# EAGLE board PCB (EAGLE 9.7.0)
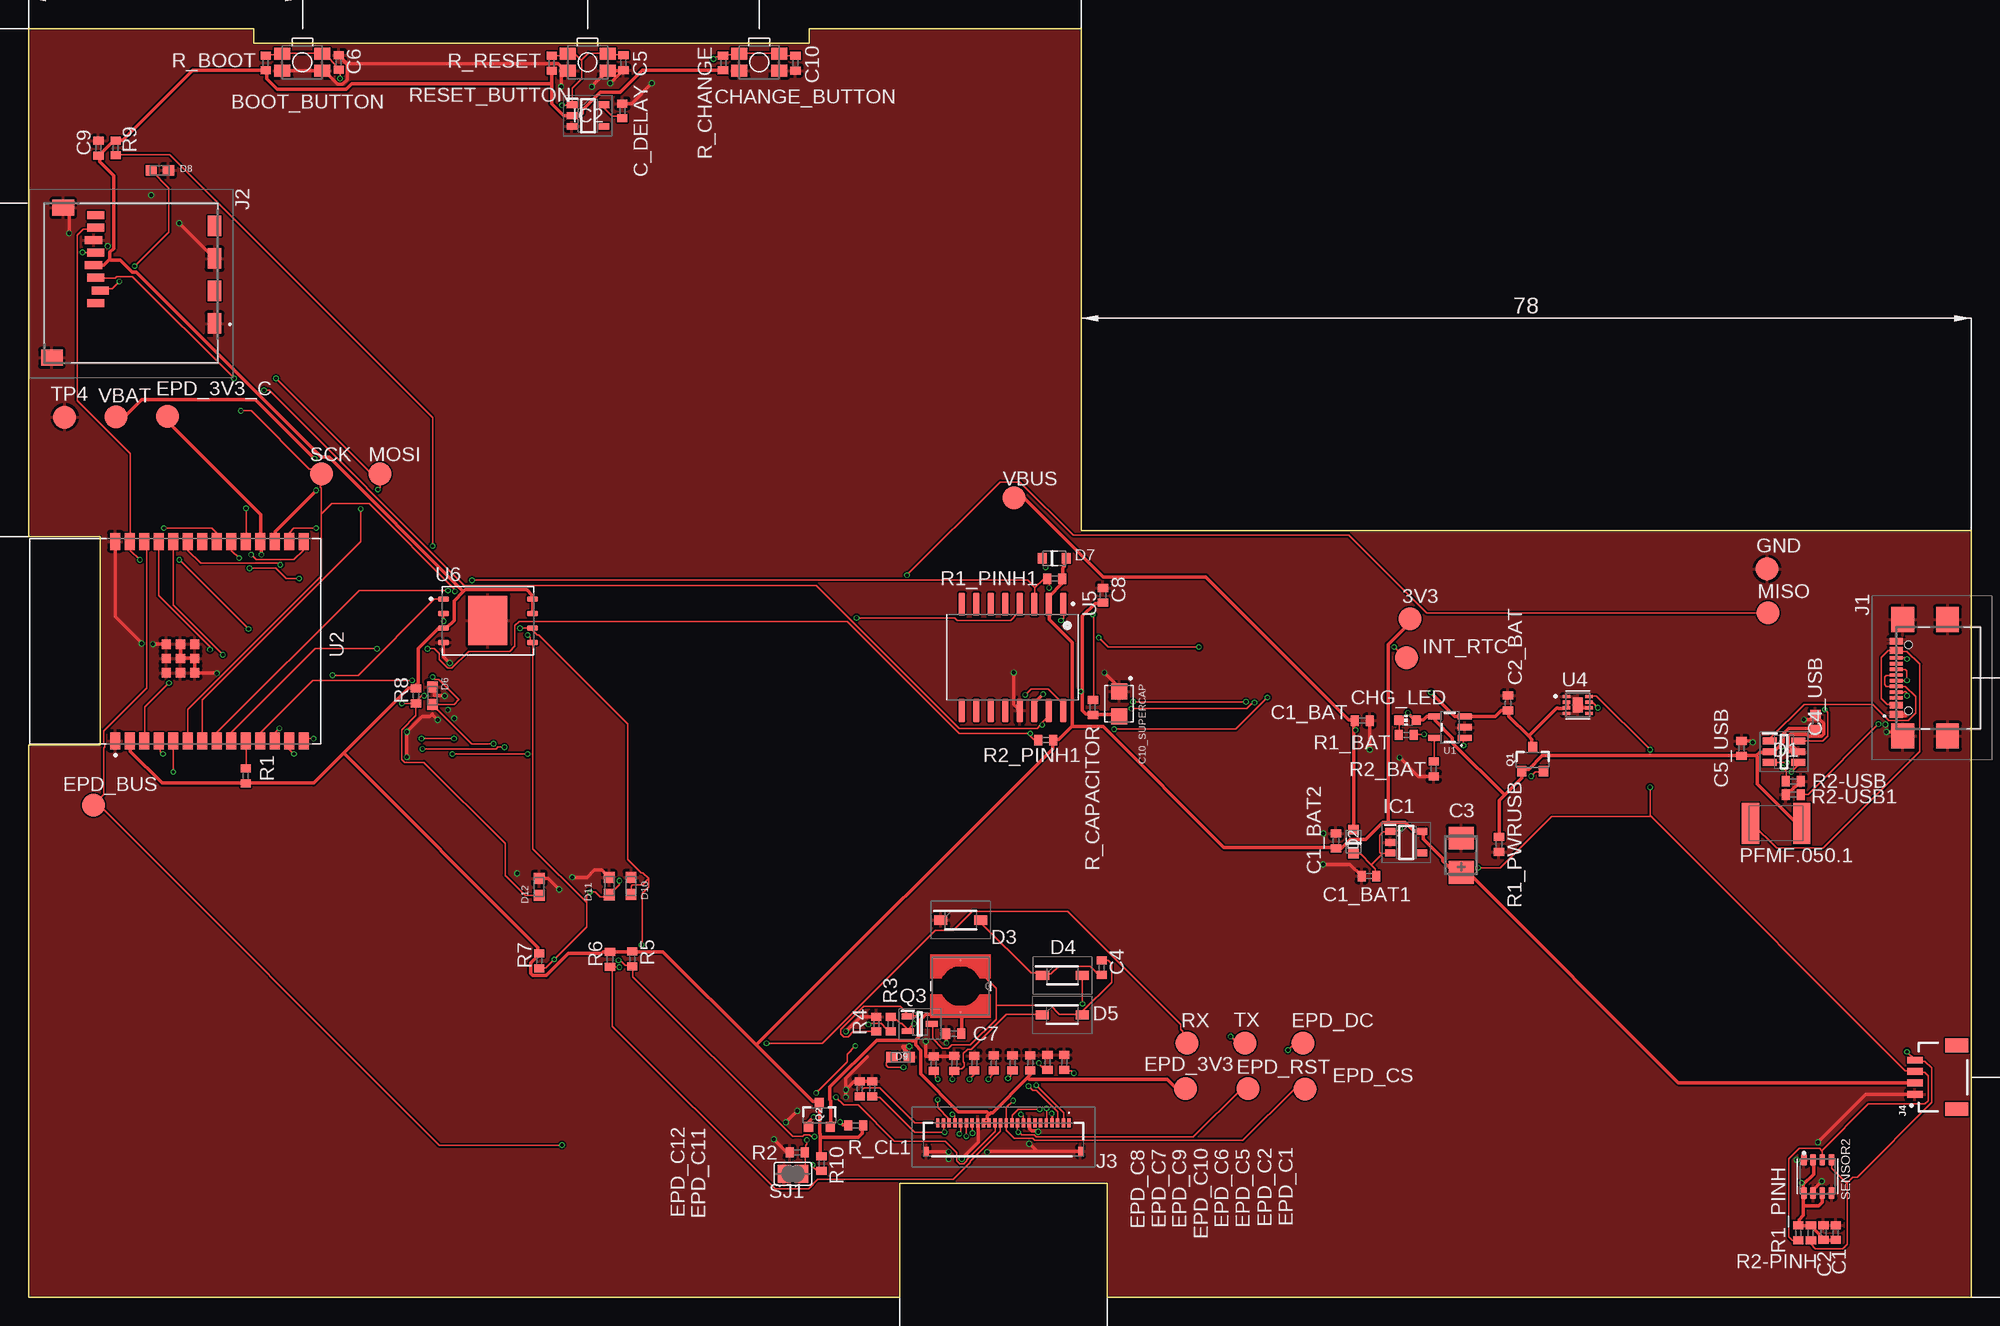
[diagram p0: board, top side]
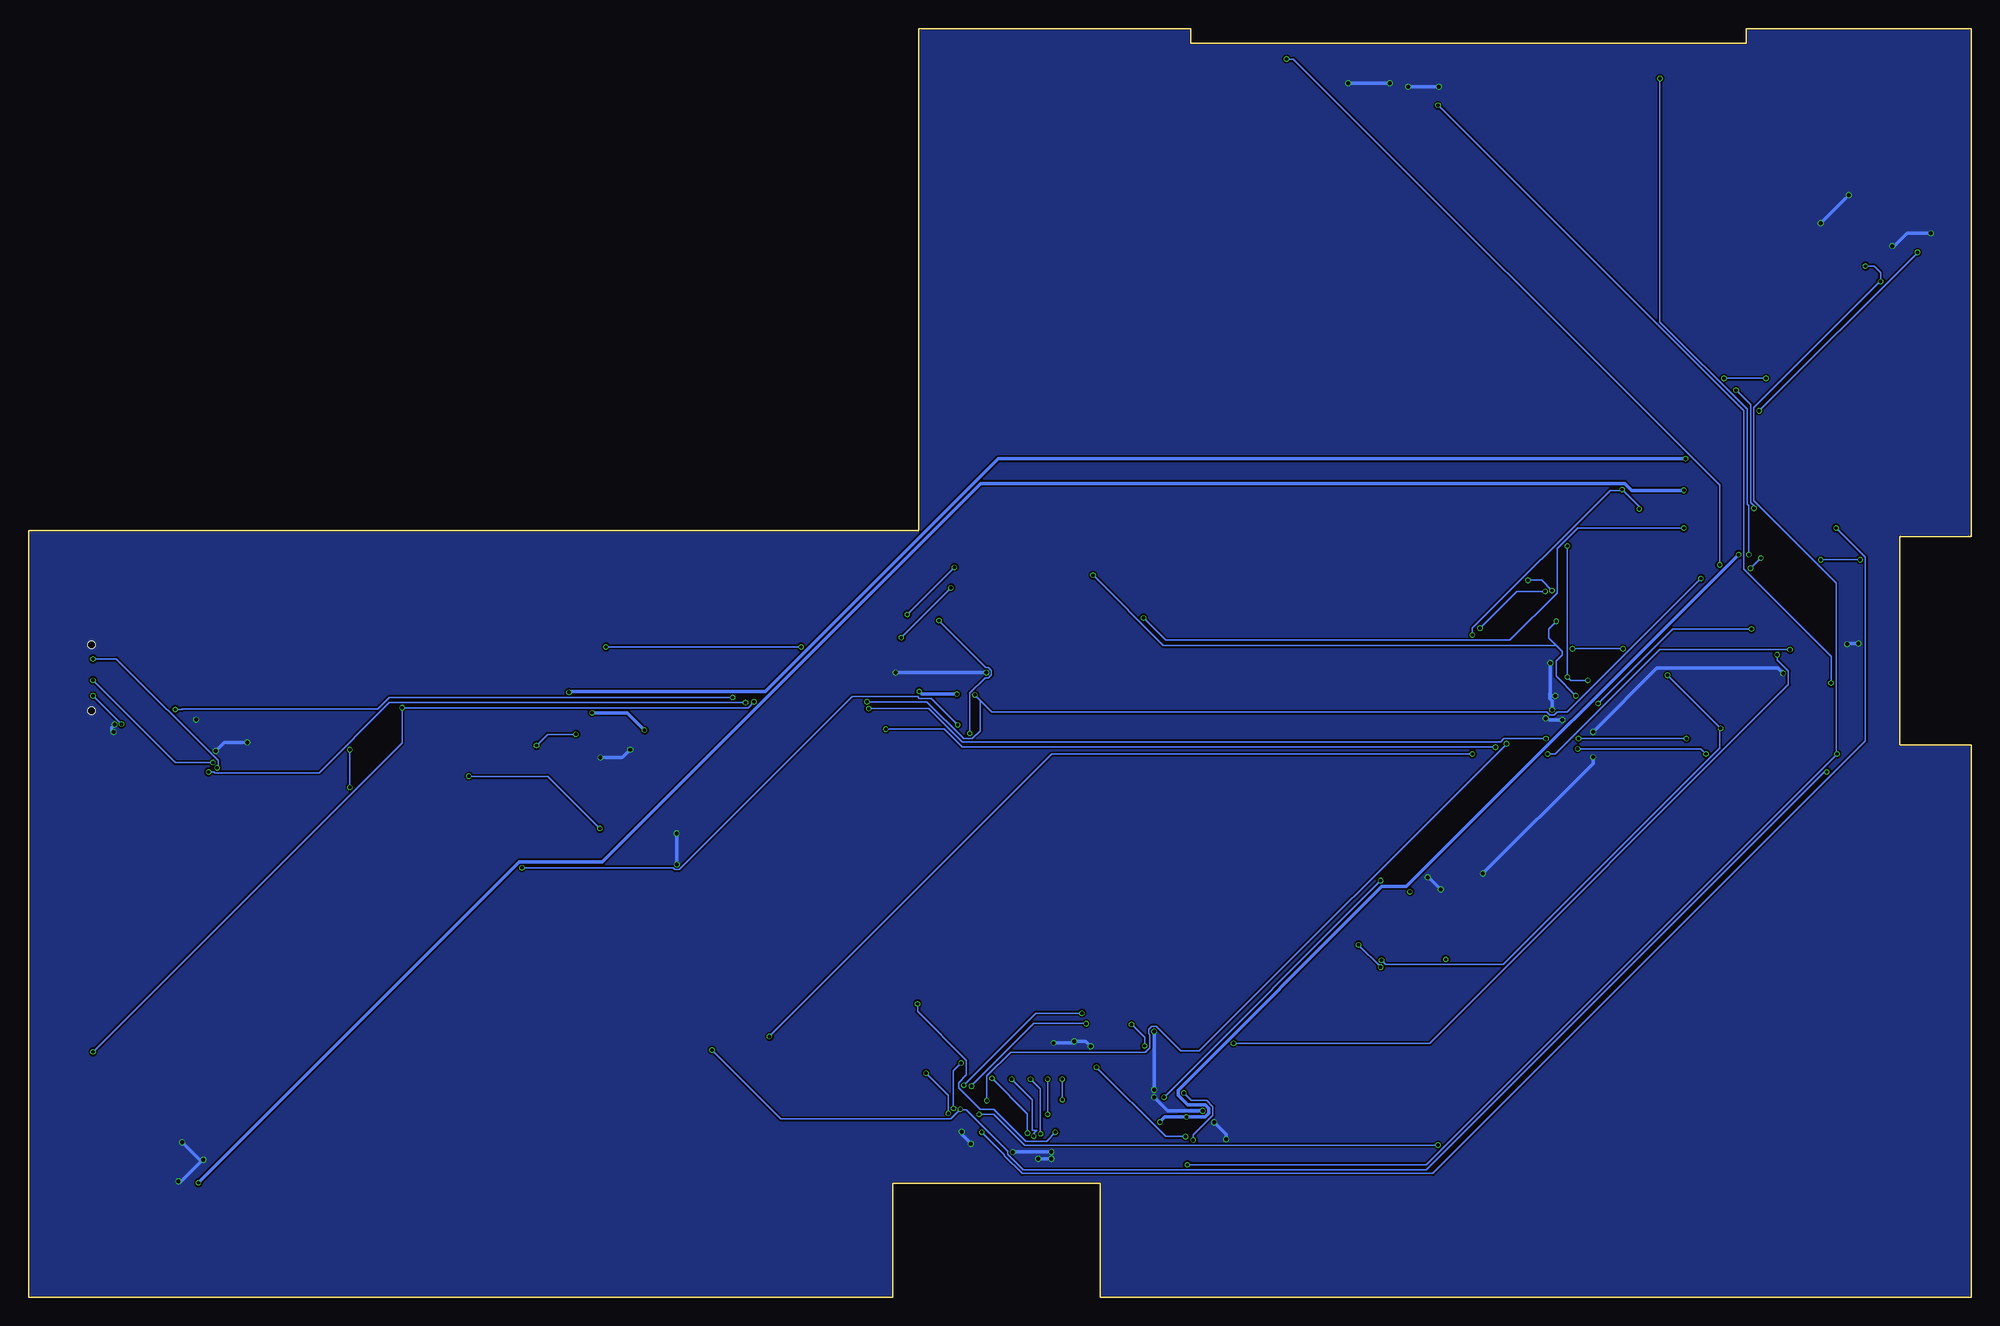
[diagram p1: board, bottom side, seen from below]

Size 170.2 x 111.2 mm. Coordinates in mm from the lower left corner, seen from the top.
Outline: 0,111.2 19.75,111.2 19.75,109.9 68.4,109.9 68.4,111.2 92.2,111.2 92.2,67.2 170.2,67.2 170.2,0 94.5,0 94.5,10 76.3,10 76.3,0 0,0 0,48.4 6.3,48.4 6.3,66.7 0,66.7 0,111.2
Copper layers (1*16): Top 0.035mm / dielectric 1.6mm / Bottom 0.035mm
Design rules "jlcpcb-2layers *": minimum track width 0.15mm, minimum drill 0.3mm, track to track 0.15mm, track to pad 5mil, pad to pad 5mil, via to via 5mil, smd to smd 5mil, copper to edge 0mil, drill to drill 6mil, minimum pad ring 10mil, minimum via ring 3mil, stop-mask expansion 4mil, vias tented up to drill 0mil, thermal gap 10mil
Net classes: 2 0.30: width 0.3 mm

## Footprints (pad centres in the part's own frame; a part is rotated, then mirrored left to right if it is on the bottom)
TP20R = smd 2 x 2: TP 0,0
MYBUTTON = smd 1.4 x 1.05: 1 1.75,0.75; 2 -1.75,0.75; 3 -1.75,-0.75; 4 1.75,-0.75
ESP32_WROVER_EAGLE-LTSPICE_C0402 = smd 0.7 x 0.9: 1 -0.65,0; 2 0.65,0
RCL_CT3528 = smd 2 x 2.2: + -1.5,0; - 1.5,0
CAPCP3225X100N = smd 1.4 x 1.4: 1 -1.1,0; 2 1.1,0
ADAFRUIT_CHIP-LED0603 = smd 0.8 x 0.8: A 0,-0.75; C 0,0.75
SOT95P280X145-6N = smd 1.2 x 0.6: 1 -1.25,0.95; 2 -1.25,0; 3 -1.25,-0.95; 4 1.25,-0.95; 5 1.25,0; 6 1.25,0.95
ESP32_WROVER_AVX---SD0805S020S1R0_AVX_SD0805S020S1R0_0 = smd 0.8 x 0.9: 1 -1.05,0; 2 1.05,0
SOD3716X135N = smd 1.15 x 0.8: 1 -1.75,0; 2 1.75,0
DIOC1608X36N = smd 0.97 x 0.94: 1 -0.75,0; 2 0.75,0
SOT95P280X120-5N = smd 0.9 x 0.6: 1 -1.4,0.95; 2 -1.4,0; 3 -1.4,-0.95; 4 1.4,-0.95; 5 1.4,0.95
SOT95P280X125-5N = smd 0.9 x 0.6: 1 -1.4,0.95; 2 -1.4,0; 3 -1.4,-0.95; 4 1.4,-0.95; 5 1.4,0.95
SAMACSYS_PARTS_USB4110GFA = smd 0.3 x 1.15: A1 -3.35,3.678; A4 -2.55,3.678; A5 -1.25,3.678; A6 -0.25,3.678; A7 0.25,3.678; A8 1.25,3.678; A9 2.55,3.678; A12 3.35,3.678; B1 3.05,3.678; B4 2.25,3.678; B5 1.75,3.678; B6 0.75,3.678; B7 -0.75,3.678; B8 -1.75,3.678; B9 -2.25,3.678; B12 -3.05,3.678 | smd 2.18 x 2: MP1 -5.11,-0.827; MP2 5.11,-0.827; MP3 -5.11,3.103; MP4 5.11,3.103 | hole 0.65: -2.89,2.603; 2.89,2.603
112ATAARR03ATTEND = smd 1.8 x 1.2: G1 10.6,10.4; G2 4.9,10.4; S1 7.75,10.4; S2 2.05,10.4 | smd 1.4 x 1.9: G3 13.6,-3.85; G4 0.45,-2.85 | smd 0.7 x 1.5: P1 8.8,0; P2 7.7,0.4; P3 6.6,0; P4 5.5,-0.2; P5 4.4,0; P6 3.3,-0.2; P7 2.2,0; P8 1.1,0
FH34SRJ24S05SH99 = smd 0.3 x 0.8: 1 5.75,1.45; 2 5.25,1.45; 3 4.75,1.45; 4 4.25,1.45; 5 3.75,1.45; 6 3.25,1.45; 7 2.75,1.45; 8 2.25,1.45; 9 1.75,1.45; 10 1.25,1.45; 11 0.75,1.45; 12 0.25,1.45; 13 -0.25,1.45; 14 -0.75,1.45; 15 -1.25,1.45; 16 -1.75,1.45; 17 -2.25,1.45; 18 -2.75,1.45; 19 -3.25,1.45; 20 -3.75,1.45; 21 -4.25,1.45; 22 -4.75,1.45; 23 -5.25,1.45; 24 -5.75,1.45 | smd 0.4 x 0.8: MP1 6.75,-1.05; MP2 -6.75,-1.05
JST04_1MM_RA = smd 0.6 x 1.35: 1 -1.5,0; 2 -0.5,0; 3 0.5,0; 4 1.5,0 | smd 1.2 x 2: NC1 2.8,-3.675; NC2 -2.8,-3.675
IND_4828-WE-TPC_WRE = smd 0.127 x 0.127: 1 -2.286,0; 2 2.286,0
ESP32C6_VARISTOR_CT/CN1812 = smd 1.5 x 3.6: 1 -2.25,0; 2 2.25,0
ESP32_WROVER_SPARKFUN-DISCRETESEMI_SOT23-3 = smd 0.8 x 0.9: 1 -0.95,-1; 2 0.95,-1; 3 0,1.1
SOT65P210X110-3N = smd 1.05 x 0.5: 1 -1.05,0.65; 2 -1.05,-0.65; 3 1.05,0
ESP32_WROVER_EAGLE-LTSPICE_R0402 = smd 0.7 x 0.9: 1 -0.65,0; 2 0.65,0
ESP32_WROVER_BME680_PSON80P300X300X100-8N = smd 1.016 x 0.5: 1 1.458,1.2; 2 1.458,0.4; 3 1.458,-0.4; 4 1.458,-1.2; 5 -1.458,-1.22; 6 -1.458,-0.4; 7 -1.458,0.4; 8 -1.458,1.2
SJ = smd 1.168 x 1.6: 1 -0.762,0; 2 0.762,0
ESP32_WROVER_SPARKFUN-IC-POWER_SOT23-5 = smd 0.55 x 1.2: 1 -0.95,-1.3; 2 0,-1.3; 3 0.95,-1.3; 4 0.95,1.3; 5 -0.95,1.3
XCVR_ESP32-C6-WROOM-1-N8 = smd 1.5 x 0.9: 1 -8.75,5.26; 2 -8.75,3.99; 3 -8.75,2.72; 4 -8.75,1.45; 5 -8.75,0.18; 6 -8.75,-1.09; 7 -8.75,-2.36; 8 -8.75,-3.63; 9 -8.75,-4.9; 10 -8.75,-6.17; 11 -8.75,-7.44; 12 -8.75,-8.71; 13 -8.75,-9.98; 14 -8.75,-11.25; 15 8.75,-11.25; 16 8.75,-9.98; 17 8.75,-8.71; 18 8.75,-7.44; 19 8.75,-6.17; 20 8.75,-4.9; 21 8.75,-3.63; 22 8.75,-2.36; 23 8.75,-1.09; 24 8.75,0.18; 25 8.75,1.45; 26 8.75,2.72; 27 8.75,3.99; 28 8.75,5.26 | smd 0.8 x 0.8: 29_1 -2.755,0.79; 29_2 -1.505,0.79; 29_3 -0.255,0.79; 29_4 -2.755,-0.46; 29_5 -1.505,-0.46; 29_6 -0.255,-0.46; 29_7 -2.755,-1.71; 29_8 -1.505,-1.71; 29_9 -0.255,-1.71
SON50P200X200X80-9N = smd 0.76 x 0.27: 1 -0.985,0.75; 2 -0.985,0.25; 3 -0.985,-0.25; 4 -0.985,-0.75; 5 0.985,-0.75; 6 0.985,-0.25; 7 0.985,0.25; 8 0.985,0.75 | smd 0.9 x 1.3: 9 0,0
SOIC127P1032X265-16N = smd 2.05 x 0.59: 1 -4.655,4.445; 2 -4.655,3.175; 3 -4.655,1.905; 4 -4.655,0.635; 5 -4.655,-0.635; 6 -4.655,-1.905; 7 -4.655,-3.175; 8 -4.655,-4.445; 9 4.655,-4.445; 10 4.655,-3.175; 11 4.655,-1.905; 12 4.655,-0.635; 13 4.655,0.635; 14 4.655,1.905; 15 4.655,3.175; 16 4.655,4.445
SON127P600X800X80-9N = smd 0.94 x 0.44: 1 -3.895,1.905; 2 -3.895,0.635; 3 -3.895,-0.635; 4 -3.895,-1.905; 5 3.895,-1.905; 6 3.895,-0.635; 7 3.895,0.635; 8 3.895,1.905 | smd 3.4 x 4.3: 9 0,0

## Placement (x,y rotation side)
3V3  TP  [TP20R]  121.03,59.46 0 top
BOOT_BUTTON  BUTTON_CUSYOMV1NEW  [MYBUTTON]  23.98,108.25 180 top
C1  100nF  [ESP32_WROVER_EAGLE-LTSPICE_C0402]  158.32,5.69 90 top
C1_BAT  4.7uF  [ESP32_WROVER_EAGLE-LTSPICE_C0402]  116.83,50.55 0 top
C1_BAT1  4.7uF  [ESP32_WROVER_EAGLE-LTSPICE_C0402]  117.42,36.93 180 top
C1_BAT2  4.7uF  [ESP32_WROVER_EAGLE-LTSPICE_C0402]  114.53,40.02 90 top
C2  100nF  [ESP32_WROVER_EAGLE-LTSPICE_C0402]  157.23,5.69 90 top
C2_BAT  4.7uF  [ESP32_WROVER_EAGLE-LTSPICE_C0402]  129.6,52.09 90 top
C3  100uF TANT  [RCL_CT3528]  125.5,38.75 90 top
C4  4.7uF/25V  [ESP32_WROVER_EAGLE-LTSPICE_C0402]  94.01,28.9 90 top
C4_USB  100nF  [ESP32_WROVER_EAGLE-LTSPICE_C0402]  156.53,50.48 90 top
C5  1uF  [ESP32_WROVER_EAGLE-LTSPICE_C0402]  52.11,108.19 270 top
C5_USB  4.7uF  [ESP32_WROVER_EAGLE-LTSPICE_C0402]  150.06,48.12 90 top
C6  100nF  [ESP32_WROVER_EAGLE-LTSPICE_C0402]  27.18,108.22 90 top
C7  10uF  [ESP32_WROVER_EAGLE-LTSPICE_C0402]  81.06,23.12 180 top
C8  100nF  [ESP32_WROVER_EAGLE-LTSPICE_C0402]  94.12,61.53 90 top
C9  100nF  [ESP32_WROVER_EAGLE-LTSPICE_C0402]  6.12,100.71 90 top
C10  100nF  [ESP32_WROVER_EAGLE-LTSPICE_C0402]  67.18,108.16 270 top
C10_SUPERCAP  CPH3225A  [CAPCP3225X100N]  95.54,52.01 270 top
C_DELAY  100nF  [ESP32_WROVER_EAGLE-LTSPICE_C0402]  52.01,103.98 90 top
CHANGE_BUTTON  BUTTON_CUSYOMV1NEW  [MYBUTTON]  64.01,108.25 180 top
CHG_LED  [ADAFRUIT_CHIP-LED0603]  120.8,50.59 90 top
D1  USBLC6-2SC6Y  [SOT95P280X145-6N]  153.78,47.82 0 top
D2  ESP32_WROVER_AVX---SD0805S020S1R0_AVX_SD0805S020S1R0_0_0AVX_SD0805S020S1R0_0_0  [ESP32_WROVER_AVX---SD0805S020S1R0_AVX_SD0805S020S1R0_0]  116.07,39.94 90 top
D3  MBR0530  [SOD3716X135N]  81.66,33.07 0 top
D4  MBR0530  [SOD3716X135N]  90.57,28.23 0 top
D5  MBR0530  [SOD3716X135N]  90.56,24.78 0 top
D6  PGB1010603MRNEW  [DIOC1608X36N]  35.38,52.73 90 top
D7  ESP32_WROVER_AVX---SD0805S020S1R0_AVX_SD0805S020S1R0_0_0AVX_SD0805S020S1R0_0_0  [ESP32_WROVER_AVX---SD0805S020S1R0_AVX_SD0805S020S1R0_0]  89.84,64.78 0 top
D8  PGB1010603MRNEW  [DIOC1608X36N]  11.51,98.77 0 top
D9  PGB1010603MRNEW  [DIOC1608X36N]  76.39,21.07 0 top
D10  PGB1010603MRNEW  [DIOC1608X36N]  52.78,36.07 90 top
D11  PGB1010603MRNEW  [DIOC1608X36N]  50.88,36.05 90 top
D12  PGB1010603MRNEW  [DIOC1608X36N]  44.73,35.98 90 top
EPD_3V3  TP  [TP20R]  101.33,18.31 0 top
EPD_3V3_C  TP  [TP20R]  12.18,77.21 0 top
EPD_BUS  TP  [TP20R]  5.67,43.14 0 top
EPD_C1  1uF/50V  [ESP32_WROVER_EAGLE-LTSPICE_C0402]  90.72,20.61 270 top
EPD_C2  1uF/50V  [ESP32_WROVER_EAGLE-LTSPICE_C0402]  89.27,20.6 270 top
EPD_C5  0.1uF/50V  [ESP32_WROVER_EAGLE-LTSPICE_C0402]  87.75,20.57 270 top
EPD_C6  1uF/50V  [ESP32_WROVER_EAGLE-LTSPICE_C0402]  86.2,20.56 270 top
EPD_C7  1uF/50V  [ESP32_WROVER_EAGLE-LTSPICE_C0402]  84.55,20.55 270 top
EPD_C8  1uF/50V  [ESP32_WROVER_EAGLE-LTSPICE_C0402]  82.85,20.54 270 top
EPD_C9  1uF/50V  [ESP32_WROVER_EAGLE-LTSPICE_C0402]  81.1,20.53 270 top
EPD_C10  1uF/50V  [ESP32_WROVER_EAGLE-LTSPICE_C0402]  79.29,20.49 270 top
EPD_C11  1uF/50V  [ESP32_WROVER_EAGLE-LTSPICE_C0402]  73.91,18.29 270 top
EPD_C12  1uF/50V  [ESP32_WROVER_EAGLE-LTSPICE_C0402]  72.81,18.29 270 top
EPD_CS  TP  [TP20R]  111.83,18.26 0 top
EPD_DC  TP  [TP20R]  111.64,22.29 0 top
EPD_RST  TP  [TP20R]  106.83,18.31 0 top
GND  TP  [TP20R]  152.29,63.84 0 top
IC1  XC6220A331MR-G  [SOT95P280X120-5N]  120.68,39.89 0 top
IC2  BD5229G-TR  [SOT95P280X125-5N]  49,103.57 0 top
INT_RTC  TP  [TP20R]  120.73,56.06 0 top
J1  SAMACSYS_PARTS_USB4110-GF-A  [SAMACSYS_PARTS_USB4110GFA]  167.28,54.3 90 top
J2  112A-TAAR-R03_ATTEND  [112ATAARR03ATTEND]  5.89,95.95 270 top
J3  FH34SRJ-24S-0.5SH_99_  [FH34SRJ24S05SH99]  85.4,13.84 0 top
J4  QWIIC_RIGHT_ANGLE  [JST04_1MM_RA]  165.25,19.3 90 top
L1  68uH  [IND_4828-WE-TPC_WRE]  81.65,27.28 270 top
MISO  TP  [TP20R]  152.36,59.99 0 top
MOSI  TP  [TP20R]  30.78,72.19 0 top
PFMF.050.1  ESP32C6_VARISTORCN1812  [ESP32C6_VARISTOR_CT/CN1812]  153.09,41.55 0 top
Q1  20V/4.2A/52mΩ/1.4W  [ESP32_WROVER_SPARKFUN-DISCRETESEMI_SOT23-3]  131.76,47.11 0 top
Q2  20V/4.2A/52mΩ/1.4W  [ESP32_WROVER_SPARKFUN-DISCRETESEMI_SOT23-3]  69.28,15.96 0 top
Q3  SI1308EDL-T1-GE3  [SOT65P210X110-3N]  78.09,23.98 0 top
R1  10K  [ESP32_WROVER_EAGLE-LTSPICE_R0402]  19.03,45.7 270 top
R1_BAT  200  [ESP32_WROVER_EAGLE-LTSPICE_R0402]  120.7,49.3 0 top
R1_PINH  10K  [ESP32_WROVER_EAGLE-LTSPICE_R0402]  155.03,5.66 90 top
R1_PINH1  10K  [ESP32_WROVER_EAGLE-LTSPICE_R0402]  89.91,62.99 0 top
R1_PWRUSB  100k  [ESP32_WROVER_EAGLE-LTSPICE_R0402]  128.81,39.7 90 top
R2  2.2  [ESP32_WROVER_EAGLE-LTSPICE_R0402]  67.33,12.71 0 top
R2-PINH  10K  [ESP32_WROVER_EAGLE-LTSPICE_R0402]  156.13,5.67 90 top
R2-USB  5k1  [ESP32_WROVER_EAGLE-LTSPICE_R0402]  154.58,45.23 0 top
R2-USB1  5K1  [ESP32_WROVER_EAGLE-LTSPICE_R0402]  154.6,44.07 0 top
R2_BAT  2K  [ESP32_WROVER_EAGLE-LTSPICE_R0402]  123.1,46.31 90 top
R2_PINH1  10K  [ESP32_WROVER_EAGLE-LTSPICE_R0402]  89.11,48.84 0 top
R3  0.47  [ESP32_WROVER_EAGLE-LTSPICE_R0402]  75.52,23.96 90 top
R4  10K  [ESP32_WROVER_EAGLE-LTSPICE_R0402]  74.26,23.96 270 top
R5  10K  [ESP32_WROVER_EAGLE-LTSPICE_R0402]  52.89,29.66 90 top
R6  10K  [ESP32_WROVER_EAGLE-LTSPICE_R0402]  50.94,29.63 90 top
R7  10K  [ESP32_WROVER_EAGLE-LTSPICE_R0402]  44.74,29.5 90 top
R8  10K  [ESP32_WROVER_EAGLE-LTSPICE_R0402]  33.94,52.72 90 top
R9  10K  [ESP32_WROVER_EAGLE-LTSPICE_R0402]  7.64,100.74 90 top
R10  10K  [ESP32_WROVER_EAGLE-LTSPICE_R0402]  69.47,11.73 90 top
R_BOOT  10K  [ESP32_WROVER_EAGLE-LTSPICE_R0402]  20.78,108.18 270 top
R_CAPACITOR  15  [ESP32_WROVER_EAGLE-LTSPICE_R0402]  93.24,51.7 270 top
R_CHANGE  10K  [ESP32_WROVER_EAGLE-LTSPICE_R0402]  60.84,108.18 270 top
R_CL1  10K  [ESP32_WROVER_EAGLE-LTSPICE_R0402]  72.46,15.08 0 top
R_RESET  10K  [ESP32_WROVER_EAGLE-LTSPICE_R0402]  45.84,108.16 270 top
RESET_BUTTON  BUTTON_CUSYOMV1NEW  [MYBUTTON]  48.97,108.25 180 top
RX  TP  [TP20R]  101.48,22.29 0 top
SCK  TP  [TP20R]  25.65,72.19 0 top
SENSOR2  ESP32_WROVER_BME680_BME680  [ESP32_WROVER_BME680_PSON80P300X300X100-8N]  156.73,10.6 90 top
SJ1  [SJ]  66.96,10.84 0 top
TP4  TP  [TP20R]  3.17,77.14 0 top
TX  TP  [TP20R]  106.56,22.29 0 top
U1  ESP32_WROVER_SPARKFUN-IC-POWER_MCP73831  [ESP32_WROVER_SPARKFUN-IC-POWER_SOT23-5]  124.51,49.97 90 top
U2  ESP32-C6-WROOM-1-N8  [XCVR_ESP32-C6-WROOM-1-N8]  12.85,57.5 90 top
U4  MAX17048G+T10  [SON50P200X200X80-9N]  135.71,51.92 0 top
U5  DS3231SN#  [SOIC127P1032X265-16N]  86.2,56.1 270 top
U6  W25Q512JVEIQ  [SON127P600X800X80-9N]  40.24,59.31 0 top
VBAT  TP  [TP20R]  7.65,77.19 0 top
VBUS  TP  [TP20R]  86.33,70.06 0 top

## Library data of the parts
3V3 BOOT_BUTTON C1 C1_BAT C1_BAT1 C1_BAT2 C2 C2_BAT C4 C4_USB C5 C5_USB C6-C10 C_DELAY CHANGE_BUTTON CHG_LED D6 D8-D12 EPD_3V3 EPD_3V3_C EPD_BUS EPD_C1 EPD_C2 EPD_C5-EPD_C12 EPD_CS EPD_DC EPD_RST GND INT_RTC MISO MOSI PFMF.050.1 R1 R1_BAT R1_PINH R1_PINH1 R1_PWRUSB R2 R2-PINH R2-USB R2-USB1 R2_BAT R2_PINH1 R3-R10 R_BOOT R_CAPACITOR R_CHANGE R_CL1 R_RESET RESET_BUTTON RX SCK SJ1 TP4 TX VBAT VBUS = DeskAssistant v19 v1
C3 = DeskAssistant v19 v1; SPICEPREFIX: C
C10_SUPERCAP = DeskAssistant v19 v1; AVAILABILITY: Not in stock; CHECK_PRICES: https://www.snapeda.com/parts/CPH3225A/Seiko+Instruments/view-part/?ref=eda; DESCRIPTION: 11 mF (EDLC) Supercapacitor 3.3 V 1210 (3225 Metric) - -; MF: Seiko Instruments; MP: CPH3225A; PACKAGE: 1210 Seiko; PRICE: None; PURCHASE-URL: https://www.snapeda.com/api/url_track_click_mouser/?unipart_id=562593&manufacturer=Seiko Instruments&part_name=CPH3225A&search_term=None; SNAPEDA_LINK: https://www.snapeda.com/parts/CPH3225A/Seiko+Instruments/view-part/?ref=snap
D1 = DeskAssistant v19 v1; AVAILABILITY: In Stock; CHECK_PRICES: https://www.snapeda.com/parts/USBLC6-2SC6Y/STMicroelectronics/view-part/?ref=eda; DESCRIPTION: 17V Clamp 5A (8/20µs) Ipp Tvs Diode Surface Mount SOT-23-6; MF: STMicroelectronics; MP: USBLC6-2SC6Y; PACKAGE: SOT-23-6 STMicroelectronics; PRICE: None; SNAPEDA_LINK: https://www.snapeda.com/parts/USBLC6-2SC6Y/STMicroelectronics/view-part/?ref=snap
D2 D7 = DeskAssistant v19 v1; CENTROID_NOT_SPECIFIED: No; DATASHEET: http://datasheets.avx.com/schottky.pdf; DIGIKEY_DESCRIPTION: DIODE SCHOTTKY 20V 1A 0805; DIGIKEY_PART_NUMBER: 478-7800-1-ND; LEAD_FREE: yes; MF: AVX; MOUSER_PART_NUMBER: 581-SD0805S020S1R0; PACKAGE: 0805 (2012 metric); PREFIX: D; ROHS: yes; TEMPERATURE_RANGE_HIGH: +125°C; TEMPERATURE_RANGE_LOW: -55°C
D3-D5 = DeskAssistant v19 v1; AVAILABILITY: In Stock; CHECK_PRICES: https://www.snapeda.com/parts/MBR0530/Onsemi/view-part/?ref=eda; DESCRIPTION: Diode Schottky 30 V 500mA Surface Mount SOD-123; MF: ON Semiconductor; MP: MBR0530; PACKAGE: SOD-123-2 ON Semiconductor; PRICE: None; PURCHASE-URL: https://www.snapeda.com/api/url_track_click_mouser/?unipart_id=179458&manufacturer=ON Semiconductor&part_name=MBR0530&search_term=None; SNAPEDA_LINK: https://www.snapeda.com/parts/MBR0530/Onsemi/view-part/?ref=snap
IC1 = DeskAssistant v19 v1; DESCRIPTION: LDO Voltage Regulators; HEIGHT: 1.2mm; MANUFACTURER_NAME: Torex; MANUFACTURER_PART_NUMBER: XC6220A331MR-G; MOUSER_PART_NUMBER: 865-XC6220A331MR-G; MOUSER_PRICE-STOCK: https://www.mouser.co.uk/ProductDetail/Torex-Semiconductor/XC6220A331MR-G?qs=AsjdqWjXhJ8ZSWznL1J0gg%3D%3D
IC2 = DeskAssistant v19 v1; DESCRIPTION: Voltage Detector with Adjustable Delay Time: CMOS processes are utilized to develop high precision, low current consumption CMOS reset ICs that allow arbitrary setting of the delay time. The extensive lineup includes both Nch Open Drain and CMOS output types in a wide range of detection voltages (from 2.3V to 6.0V, in 0.1V steps), enabling selection of the ideal solution based on customer requirements. In addition, the entire series is of course both lead-free and RoHS-compliant.; HEIGHT: 1.25mm; MANUFACTURER_NAME: ROHM Semiconductor; MANUFACTURER_PART_NUMBER: BD5229G-TR; MOUSER_PART_NUMBER: 755-BD5229G-TR; MOUSER_PRICE-STOCK: https://www.mouser.co.uk/ProductDetail/ROHM-Semiconductor/BD5229G-TR?qs=4kLU8WoGk0vvnhrrYwdszw%3D%3D
J1 = DeskAssistant v19 v1; DESCRIPTION: CONN USB 2.0 TYPE-C R/A SMT; HEIGHT: 3.26mm; MANUFACTURER_NAME: GCT (GLOBAL CONNECTOR TECHNOLOGY); MANUFACTURER_PART_NUMBER: USB4110-GF-A; MOUSER_PART_NUMBER: 640-USB4110-GF-A; MOUSER_PRICE-STOCK: https://www.mouser.co.uk/ProductDetail/GCT/USB4110-GF-A?qs=KUoIvG%2F9IlYiZvIXQjyJeA%3D%3D
J2 = DeskAssistant v19 v1; DESCRIPTION: Micro SD Card Socket, Push-Push Type, Top Mount, SMT, H=1.83mm, 10u; HEIGHT: 1.9mm; MANUFACTURER_NAME: ATTEND; MANUFACTURER_PART_NUMBER: 112A-TAAR-R03 ATTEND
J3 = DeskAssistant v19 v1; DESCRIPTION: 24 Position FFC, FPC Connector Contacts, Top and Bottom 0.020" (0.50mm) Surface Mount, Right Angle; HEIGHT: 1.1mm; MANUFACTURER_NAME: Hirose; MANUFACTURER_PART_NUMBER: FH34SRJ-24S-0.5SH(99); MOUSER_PART_NUMBER: 798-FH34SRJ24S05SH99; MOUSER_PRICE-STOCK: https://www.mouser.co.uk/ProductDetail/Hirose-Connector/FH34SRJ-24S-0.5SH99?qs=vcbW%252B4%252BSTIpKBl5ap9J8Fw%3D%3D
J4 = DeskAssistant v19 v1; PROD_ID: CONN-13694
L1 = DeskAssistant v19 v1; COPYRIGHT: Copyright (C) 2024 Ultra Librarian. All rights reserved.; MANUFACTURER_PART_NUMBER: 744043680; MFR_NAME: Wurth Electronics
Q1 Q2 = DeskAssistant v19 v1; PROD_ID: TRAN-14388
Q3 = DeskAssistant v19 v1; AVAILABILITY: In Stock; CHECK_PRICES: https://www.snapeda.com/parts/SI1308EDL-T1-GE3/Vishay+Siliconix/view-part/?ref=eda; DESCRIPTION: Si1308EDL-T1-GE3 N-channel MOSFET Transistor, 1.5 A, 30 V, 3-Pin SC-70 | Siliconix / Vishay SI1308EDL-T1-GE3; MF: Vishay Siliconix; MP: SI1308EDL-T1-GE3; PACKAGE: SOT-323 Vishay Semiconductor; PRICE: None; PURCHASE-URL: https://www.snapeda.com/api/url_track_click_mouser/?unipart_id=274603&manufacturer=Vishay Siliconix&part_name=SI1308EDL-T1-GE3&search_term=None; SNAPEDA_LINK: https://www.snapeda.com/parts/SI1308EDL-T1-GE3/Vishay+Siliconix/view-part/?ref=snap
SENSOR2 = DeskAssistant v19 v1; AVAILABILITY: Unavailable; DESCRIPTION: Integrated Environmental Unit; MF: Bosch Sensortec; MP: BME680; PACKAGE: LGA-8 Bosch Tools; PRICE: None
U1 = DeskAssistant v19 v1; PROD_ID: IC-09995
U2 = DeskAssistant v19 v1; AVAILABILITY: In Stock; CHECK_PRICES: https://www.snapeda.com/parts/ESP32-C6-WROOM-1-N8/Espressif+Systems/view-part/?ref=eda; DESCRIPTION: Multiprotocol Modules ESP32-C6 module, Wi-Fi 6 in 2.4 GHz band, Bluetooth 5, Zigbee 3.0 and Thread. ESP34-WROOM Compatible - ENGINEERING SAMPLE; MF: Espressif Systems; MP: ESP32-C6-WROOM-1-N8; PACKAGE: None; PRICE: None; SNAPEDA_LINK: https://www.snapeda.com/parts/ESP32-C6-WROOM-1-N8/Espressif+Systems/view-part/?ref=snap
U4 = DeskAssistant v19 v1; AVAILABILITY: In Stock; CHECK_PRICES: https://www.snapeda.com/parts/MAX17048G+T10/Analog+Devices/view-part/?ref=eda; DESCRIPTION: 3µA 1-Cell/2-Cell Fuel Gauge with ModelGauge; MF: Analog Devices; MP: MAX17048G+T10; PACKAGE: TDFN-8 Maxim; PRICE: None; PURCHASE-URL: https://www.snapeda.com/api/url_track_click_mouser/?unipart_id=329239&manufacturer=Analog Devices&part_name=MAX17048G+T10&search_term=None; SNAPEDA_LINK: https://www.snapeda.com/parts/MAX17048G+T10/Analog+Devices/view-part/?ref=snap
U5 = DeskAssistant v19 v1; AVAILABILITY: In Stock; CHECK_PRICES: https://www.snapeda.com/parts/DS3231SN%23/Analog+Devices/view-part/?ref=eda; DESCRIPTION: Extremely Accurate I²C-Integrated RTC/TCXO/Crystal; MF: Analog Devices; MP: DS3231SN#; PACKAGE: SOIC-16 Maxim; PRICE: None; PURCHASE-URL: https://www.snapeda.com/api/url_track_click_mouser/?unipart_id=99048&manufacturer=Analog Devices&part_name=DS3231SN#&search_term=None; SNAPEDA_LINK: https://www.snapeda.com/parts/DS3231SN%23/Analog+Devices/view-part/?ref=snap
U6 = DeskAssistant v19 v1; AVAILABILITY: In Stock; CHECK_PRICES: https://www.snapeda.com/parts/W25Q512JVEIQ/Winbond+Electronics/view-part/?ref=eda; DESCRIPTION: FLASH - NOR Memory IC 512Mb (64M x 8) SPI - Quad I/O 133 MHz 8-WSON (8x6); MF: Winbond Electronics; MP: W25Q512JVEIQ; PACKAGE: Package; PRICE: None; SNAPEDA_LINK: https://www.snapeda.com/parts/W25Q512JVEIQ/Winbond+Electronics/view-part/?ref=snap

## Nets
3V3 [0.30]: 3V3.TP C1_BAT2.1 C3.+ C9.1 D7.2 IC1.5 IC2.2 J2.P4 J4.2 Q2.3 R1.2 R1_PINH1.2 R2_PINH1.2 R5.2 R6.2 R7.2 R8.2 R9.2 R10.2 R_BOOT.2 R_CHANGE.2 R_CL1.2 R_RESET.2 U2.2 U5.2 U6.3 U6.7 U6.8
32KHZ [0.15]: R2_PINH1.1 U2.9 U5.1
DN [0.15]: D1.1 J1.A7 J1.B7
DP [0.15]: D1.3 J1.A6 J1.B6
EPD_3V3 [0.30]: C7.1 EPD_3V3.TP EPD_C5.2 J3.15 J3.16 L1.2 Q2.2
EPD_3V3_C [0.30]: EPD_3V3_C.TP Q2.1 R_CL1.1 U2.18
EPD_BUSY [0.15]: EPD_BUS.TP J3.9 U2.26
EPD_CS [0.15]: D6.1 EPD_CS.TP J3.12 R9.1 U2.11
EPD_DC [0.15]: EPD_DC.TP J3.11 U2.5
EPD_RST [0.15]: EPD_RST.TP J3.10 U2.21
FLASH_CS [0.15]: D9.1 R5.1 U2.12 U6.1
GDR [0.15]: J3.2 Q3.1 R4.2
GND [0.30]: BOOT_BUTTON.1 BOOT_BUTTON.2 C1.2 C1_BAT1.2 C1_BAT2.2 C1_BAT.2 C2.2 C2_BAT.2 C3.- C4_USB.2 C5.2 C5_USB.2 C6.2 C7.2 C8.2 C9.2 C10.2 C10_SUPERCAP.1 C_DELAY.2 CHANGE_BUTTON.1 CHANGE_BUTTON.2 D1.5 D3.1 D6.2 D8.2 D9.2 D10.2 D11.2 D12.2 EPD_C1.1 EPD_C2.1 EPD_C5.1 EPD_C6.1 EPD_C7.1 EPD_C8.1 EPD_C9.1 EPD_C10.1 EPD_C11.1 EPD_C12.1 GND.TP IC1.2 IC2.3 J1.A1 J1.A12 J1.B1 J1.B12 J1.MP1 J1.MP2 J1.MP3 J1.MP4 J2.G1 J2.G2 J2.G3 J2.G4 J2.P6 J3.8 J3.17 J3.MP1 J3.MP2 J4.1 R1_PWRUSB.1 R2-USB1.1 R2-USB.2 R2.1 R2_BAT.1 R4.1 RESET_BUTTON.1 RESET_BUTTON.2 SENSOR2.1 SENSOR2.5 SENSOR2.7 SJ1.1 TP4.TP U1.2 U2.1 U2.28 U2.29_1 U2.29_2 U2.29_3 U2.29_4 U2.29_5 U2.29_6 U2.29_7 U2.29_8 U2.29_9 U4.1 U4.4 U4.6 U4.9 U5.13 U6.4 U6.9
GPIO8 [0.15]: R1.1 U2.10
I2C_PW [0.30]: C1.1 C2.1 R1_PINH.2 R2-PINH.2 SENSOR2.2 SENSOR2.6 SENSOR2.8 U2.17
INT_RTC [0.15]: INT_RTC.TP R1_PINH1.1 U2.8 U5.3
IO/BOOT [0.15]: BOOT_BUTTON.3 BOOT_BUTTON.4 C6.1 R_BOOT.1 U2.15
IO/CHANGE [0.15]: C10.1 CHANGE_BUTTON.3 CHANGE_BUTTON.4 R_CHANGE.1 U2.23
MISO [0.15]: D12.1 J2.P7 MISO.TP R8.1 U2.27 U6.2
MOSI [0.15]: D11.1 J2.P3 J3.14 MOSI.TP R7.1 U2.7 U6.5
N$1 [0.15]: EPD_C12.2 J3.24
N$2 [0.15]: C1_BAT1.1 D2.1 IC1.1 IC1.3 Q1.2
N$3 [0.15]: J1.A5 R2-USB1.2
N$4 [0.15]: CHG_LED.C R1_BAT.1
N$5 [0.15]: C4.1 D3.2 D4.1
N$6 [0.15]: R1_BAT.2 U1.1
N$8 [0.15]: R2_BAT.2 U1.5
N$9 [0.15]: EPD_C10.2 J3.22
N$10 [0.15]: C_DELAY.1 IC2.5
N$11 [0.15]: J1.B5 R2-USB.1
N$12 [0.15]: EPD_C8.2 J3.20
N$13 [0.15]: EPD_C7.2 J3.19
N$14 [0.15]: EPD_C6.2 J3.18
N$21 [0.15]: D7.1 R_CAPACITOR.1
N$22 [0.15]: EPD_C2.2 J3.5
N$23 [0.15]: EPD_C1.2 J3.4
PREVGH [0.15]: D5.1 EPD_C9.2 J3.21
PREVGL [0.15]: D4.2 EPD_C11.2 J3.23
RESE [0.15]: J3.3 Q3.2 R3.2
RESE' [0.15]: R2.2 R3.1 SJ1.2
RESET [0.15]: C5.1 IC2.1 R_RESET.1 RESET_BUTTON.3 RESET_BUTTON.4 U2.3
RTC_RST [0.15]: U2.16 U5.4
RX [0.15]: RX.TP U2.24
SCK [0.15]: D10.1 J2.P5 J3.13 R6.1 SCK.TP U2.6 U6.6
SCL [0.15]: J4.4 R2-PINH.1 SENSOR2.4 U2.20 U4.7 U5.16
SDA [0.15]: J4.3 R1_PINH.1 SENSOR2.3 U2.19 U4.8 U5.15
SRC [0.15]: C4.2 D5.2 L1.1 Q3.3
SS_SD [0.15]: D8.1 J2.P2 R10.1 U2.4
TX [0.15]: TX.TP U2.25
USB_D+ [0.15]: D1.4 U2.14
USB_D- [0.15]: D1.6 U2.13
VBAT [0.30]: C2_BAT.1 Q1.3 U1.3 U4.2 U4.3 VBAT.TP
VBUS [0.30]: C1_BAT.1 C4_USB.1 C5_USB.1 CHG_LED.A D1.2 D2.2 PFMF.050.1.2 Q1.1 R1_PWRUSB.2 U1.4 VBUS.TP
VRTC [0.30]: C8.1 C10_SUPERCAP.2 R_CAPACITOR.2 U5.14
VUSB [0.15]: J1.A4 J1.A9 J1.B4 J1.B9 PFMF.050.1.1

## Tracks (layer width: path | path; a pad name or v marks a point on that pad's centre or on a via)
3V3
  Top 0.3: D7.2 90.83,64.73 90.75,64.65 90.75,64.05 90.6,63.9 90.6,63 R1_PINH1.2 90.53,62.85 90.53,62.55 89.4,61.42 89.4,60.9 U5.2 89.4,60.75 89.4,59.4 91.42,57.38 91.42,50.1 | 91.42,50.1 90.22,48.9 89.78,48.9 R2_PINH1.2 89.7,48.75 89.7,48.07 63.75,22.12 | 119.1,41.62 120.6,41.62 121.35,40.88 122.03,40.88 IC1.5 122.17,40.73 122.17,40.2 123.9,38.48 123.9,38.25 124.8,37.35 125.4,37.35 C3.+ 125.55,37.2 126.15,37.2 144.53,18.82 165.22,18.82 J4.2 | 119.1,41.62 118.65,41.62 117.15,40.12 115.8,40.12 115.05,39.38 114.6,39.38 C1_BAT2.1 114.45,39.45 104.7,39.45 94.12,50.02 91.5,50.02 91.42,50.1 | 119.1,41.62 119.1,57.23 120.97,59.1 120.97,59.4 3V3.TP | 45.83,106.35 45.83,107.48 R_RESET.2 | 45.83,106.35 45.83,104.62 46.88,103.58 47.55,103.58 IC2.2 47.7,103.58 48.3,103.58 48.52,103.8 48.52,104.03 50.1,105.6 51.83,105.6 53.77,107.55 60.83,107.55 R_CHANGE.2 | J2.P4 6.6,90.45 7.12,90.98 | 69.38,14.03 69.38,12.53 69.45,12.45 R10.2 | 69.38,14.03 69.38,14.33 69.3,14.4 69.3,17.02 Q2.3 69.22,17.17 68.7,17.17 63.75,22.12 | 69.38,14.03 72.67,14.03 73.05,14.4 73.05,15.08 R_CL1.2 | 63.75,22.12 55.58,30.3 53.02,30.3 R5.2 52.88,30.3 51.08,30.3 R6.2 50.92,30.3 50.33,30.3 50.17,30.15 47.29,30.15 45.36,28.22 44.17,28.22 44.01,28.38 44.01,29.31 44.74,30.04 R7.2 44.62,30.22 44.62,30.67 27.6,47.7 | U2.2 8.93,48.75 8.93,47.85 11.7,45.07 18.98,45.07 R1.2 19.12,45.07 24.98,45.07 27.6,47.7 | U6.7 44.17,60 44.17,61.2 U6.8 44.1,61.35 44.1,61.57 43.65,62.02 38.25,62.02 38.1,61.88 | 38.1,61.88 37.27,61.05 37.27,59.32 36.6,58.65 36.45,58.65 U6.3 36.3,58.65 35.92,58.65 34.12,56.85 34.12,53.85 33.98,53.7 33.98,53.4 R8.2 33.83,53.4 33.3,53.4 27.6,47.7
  Top 0.3: 38.1,61.88 26.32,73.65 25.65,73.65 9.45,89.85 9.07,89.85 8.03,90.9 7.2,90.9 7.12,90.98 | 45.83,106.35 28.32,106.35 27.84,105.87 21.78,105.87 20.85,106.8 20.85,107.33 20.93,107.4 20.93,107.48 R_BOOT.2 20.77,107.55 14.4,107.55 8.25,101.4 7.72,101.4 R9.2 7.58,101.33 7.42,101.33 6.22,100.12 6.15,100.12 C9.1 6.22,99.98 6.22,99.53 7.46,98.29 7.46,91.92 7.12,91.59 7.12,90.98
32KHZ  (via drill 0.3)
  Top 0.15: v90.45,59.32 90.67,59.55 90.67,60.75 U5.1 | R2_PINH1.1 88.42,48.9 88.05,48.9 87.75,49.2 v87.75,49.42 81.53,49.42 71.7,59.25 42.98,59.25 42.6,58.88 42.6,57.07 42.15,56.62 38.57,56.62 37.09,55.15 36.71,55.15 35.97,55.89 35.97,56.43 35.55,56.85 v34.95,56.85 | v30.52,56.85 25.12,56.85 17.77,49.5 17.77,48.75 U2.9
  Bottom 0.15: v34.95,56.85 v30.52,56.85 | v87.75,49.42 87.75,52.96 86.41,54.3 86.11,54.3 85.85,54.56 85.85,54.94 86.11,55.2 86.33,55.2 v90.45,59.32
DN
  Top 0.15: J1.A7 163.57,54.52 162.75,54.52 162.6,54.38 162.6,53.7 162.75,53.55 J1.B7 164.4,53.55 165.3,52.65 165.3,51.23 164.65,50.57 162.97,50.57 161.57,51.98 155.55,51.98 152.55,48.98 152.55,48.82 D1.1
DP  (via drill 0.3)
  Top 0.15: 164.51,54.11 164.55,54.15 164.55,54.9 164.4,55.05 J1.B6 | 164.51,54.11 164.4,54 164.32,54 164.25,54.07 163.65,54.07 J1.A6 | v154.05,46.88 152.55,46.88 D1.3 | v164.55,54.07 164.51,54.11
  Bottom 0.15: v154.05,46.88 157.35,46.88 v164.55,54.07
EPD_3V3
  Top 0.3: 77.62,22.5 78.15,23.02 78.15,24.38 78.6,24.82 81.45,24.82 81.6,24.97 L1.2 81.75,24.9 81.75,23.17 C7.1 | Q2.2 70.28,15 70.28,17.25 70.2,17.32 70.2,18.44 74.29,22.53 77.37,22.53 77.4,22.5 77.62,22.5 | J3.16 83.7,15.3 J3.15 84.15,15.53 84,15.68 84,15.9 84.15,16.05 | EPD_C5.2 87.75,19.5 87.53,19.27 | 87.53,19.27 84.45,16.2 84.3,16.2 84.15,16.05 | EPD_3V3.TP 101.33,18.38 100.5,18.38 99.75,19.12 87.67,19.12 87.53,19.27 | 84.15,16.05 83.92,16.27 81.45,16.27 78.15,19.57 78.15,21.67 77.7,22.12 77.7,22.42 77.62,22.5
EPD_3V3_C  (via drill 0.3)
  Top 0.3: v68.78,15.83 68.4,15.45 68.4,15 Q2.1 | v71.1,15.38 71.33,15.15 71.78,15.15 R_CL1.1 | EPD_3V3_C.TP 12.22,77.18 12.22,76.73 20.32,68.62 20.32,66.3 U2.18 20.4,66.15 v20.4,65.1
  Bottom 0.3: 69.53,15.83 70.65,15.83 v71.1,15.38 | 69.53,15.83 v68.78,15.83 | v20.4,65.1 49.5,36 51.67,36 69.5,18.17 69.5,17.72 68.67,16.88 67.13,16.88 66.82,16.57 66.82,16.13 67.13,15.82 67.57,15.82 67.57,15.83 69.53,15.83
EPD_BUSY  (via drill 0.3)
  Top 0.15: J3.9 87.15,15.97 87.08,16.05 v86.92,16.05 | v46.73,13.35 36,13.35 6.22,43.12 | 6.22,43.12 5.7,43.12 EPD_BUS.TP 6.22,43.12 | 6.22,43.12 6.22,43.73 6.6,44.1 6.6,48.15 6.67,48.23 6.67,48.45 6.6,48.52 6.6,49.65 10.35,53.4 10.35,66.03 U2.26
  Bottom 0.15: v86.92,16.05 85.65,16.05 82.95,13.35 v46.73,13.35
EPD_CS  (via drill 0.3)
  Top 0.15: EPD_CS.TP 111.83,18.3 110.92,18.3 106.38,13.76 88.14,13.76 87.96,13.94 86.34,13.94 85.65,14.62 J3.12 85.65,16.65 v86.25,17.25 | v35.4,65.85 35.4,77.1 12.38,100.12 7.65,100.12 R9.1 | v33.6,54.07 24.9,54.07 20.32,49.5 20.32,48.75 U2.11 | v40.73,48.52 38.84,48.52 D6.1 37.28,51.98 37.7,52.4 35.93,54.17 35.61,54.17 v35.4,54.38
  Bottom 0.15: v35.4,65.85 v35.4,54.38 35.1,54.07 v33.6,54.07 | v86.25,17.25 86.25,19.42 84.17,21.5 72.37,21.5 72,21.87 72,23.06 72.05,23.11 72.05,23.49 71.79,23.75 71.41,23.75 69.26,21.6 67.65,21.6 v40.73,48.52
EPD_DC  (via drill 0.3)
  Top 0.15: v88.58,16.5 86.7,16.5 86.17,15.97 86.17,15.3 J3.11 | v110.33,21.67 110.92,22.27 111.6,22.27 EPD_DC.TP | v12.68,46.05 U2.5
  Bottom 0.15: v110.33,21.67 104.33,15.68 89.4,15.68 v88.58,16.5 88.58,16.43 88.04,16.43 84.42,12.8 84.42,12.55 83.04,11.18 47.77,11.18 12.9,46.05 v12.68,46.05
EPD_RST  (via drill 0.3)
  Top 0.15: 86.74,14.51 86.62,14.62 86.62,15.22 J3.10 | EPD_RST.TP 106.8,18.3 106.28,18.3 102.03,14.06 88.26,14.06 88.08,14.24 87.01,14.24 86.74,14.51 | v11.85,67.43 16.05,67.43 16.43,67.05 16.43,66.3 U2.21 | 86.74,14.51 v86.7,14.47
  Bottom 0.15: v11.85,67.43 9.3,64.88 9.3,48.75 47.17,10.88 83.17,10.88 84.72,12.42 84.72,12.49 v86.7,14.47
FLASH_CS  (via drill 0.3)
  Top 0.15: v26.62,54.52 28.88,54.52 35.55,61.2 36.3,61.2 U6.1 | v21.98,49.88 21.52,49.42 21.52,48.75 U2.12 | v68.85,14.1 68.55,14.1 68.4,14.25 67.95,14.25 67.8,14.1 66.96,14.1 52.95,28.11 52.95,28.95 R5.1 52.8,29.1 52.27,29.1 51.83,29.55 v51.67,29.55 | v76.65,20.17 75.33,20.17 75.15,20.35 75.15,20.58 D9.1
  Bottom 0.15: v26.62,54.52 v21.98,49.88 22.05,49.88 22.05,48.15 41.02,29.17 51.3,29.17 v51.67,29.55 | v68.85,14.1 70.58,14.1 v76.65,20.17
GDR  (via drill 0.3)
  Top 0.15: v88.28,18.6 90.67,16.2 90.67,15.3 J3.2 | v77.92,24.9 77.7,24.67 77.1,24.67 Q3.1 77.03,24.67 77.03,24.82 76.35,25.5 73.16,25.5 71.15,23.49 71.15,23.11 71.41,22.85 71.79,22.85 72.27,23.32 74.25,23.32 R4.2
  Bottom 0.15: v88.28,18.6 81.97,24.9 v77.92,24.9
GND  (via drill 0.3, 0.35)
  Top 0.3: 13.35,56.02 13.35,57.23 U2.29_6 | 13.35,56.02 U2.29_5 | R4.1 72.91,24.61 v71.6,23.3 | v71.6,18.2 72.34,18.94 EPD_C12.1 | C1_BAT1.2 115.75,37.95 v113.4,37.95 | C5_USB.2 150.93,48.77 v151.05,48.65 | v153.8,47.9 154.95,47.9 D1.5 154.66,48.19 154.31,48.19 154.15,48.35 154.15,49.18 154.31,49.35 155.82,49.35 155.97,49.2 157.09,49.2 157.26,49.37 157.26,50.3 156.92,50.63 v155.53,50.63 | R2-USB.2 154.8,44.8 154.78,44.8 154.06,44.07 R2-USB1.1 | J3.MP1 88.36,12.79 | J3.MP2 78.69,12.75 v80.6,12.75 v80.6,12.15 | 88.36,12.79 84.02,12.79 v83.96,12.74 | v71.6,18.2 72.34,18.94 EPD_C11.1 | v71.6,18.2 71.6,19.2 73.47,21.07 | EPD_C9.1 81.06,21.14 EPD_C10.1 78.61,21.14 78.6,21.15 v78.6,22.45 | v80.4,22.3 v80.41,22.31 C7.2 | D9.2 76.57,22 v77.15,22 | R2_BAT.1 121.74,45.66 v120.1,47.3 | v117.5,48 117.5,50.53 C1_BAT.2 | U5.13 86.3,51.98 v86.3,54.75 | v94.25,54.75 95.54,53.46 C10_SUPERCAP.1 | J2.G2 v13.2,94.14 v13.2,94.15 | J2.G4 3.55,94.99 v3.55,93.25 | v49.35,106.1 49.35,106.13 RESET_BUTTON.2 52.07,107.5 C5.2 50.97,106.4 v50.95,106.4 | v46.65,106.1 46.65,106.93 RESET_BUTTON.1 47.04,107.5 46.41,108.14 27.92,108.14 C6.2 27.18,108.76 27.91,108.04 27.91,106.73 27.5,106.32 27.08,106.32 25.9,107.5 BOOT_BUTTON.1 | v54.6,106.4 52.83,104.63 C_DELAY.2 | U2.28 7.59,59.66 9.9,57.35 v9.9,57.3 | v10.9,57.25 U2.29_3 | 13.35,56.02 14.53,56.02 U2.29_8 U2.29_7 16.45,54.74 v16.5,54.7 | v71.6,18.2 v71.6,17.55 | v67.35,16.35 v66.35,15.35 | v65.3,13.85 66.44,12.71 R2.1 | U6.4 36.34,56.16 v36.9,55.6 | v33.15,47.35 v33.15,49.55 34.5,50.9 35.15,50.9 35.38,51.13 35.38,51.07 v35.85,50.6 | J4.1 160.95,17.8 v156.75,13.6 | v157.07,10.18 156.83,9.93 156.8,9.93 156.33,9.46 SENSOR2.7
  Top 0.3: v162.75,49.55 163.82,49.55 J1.MP3 | U4.6 135.96,51.67 U4.9 | v81.75,12.15 83.2,13.6 83.2,15.24 J3.17 | J3.8 87.72,15.22 87.72,14.78 87.89,14.61 88.35,14.61 v88.45,14.51 | 88.36,12.79 87.69,13.46 v87.65,13.46 | J1.B12 164.1,51.25 164.4,50.95 J1.A1 | D12.2 45.52,36.73 v46.5,35.75 | v47.62,36.82 48.92,36.82 49.55,37.45 50.23,37.45 D11.2 | D6.2 35.55,53.31 35.55,52.74 36.45,52.74 v36.45,52.7
  Bottom 0.3: v71.6,23.3 v71.6,18.2 | v113.4,37.95 113.4,40.64 v113.43,40.67 | v151.05,48.65 153.05,48.65 v153.8,47.9 | v83.96,12.74 v83.95,12.75 v80.6,12.75 | v81.75,12.15 v80.6,12.15 | v80.4,22.3 78.75,22.3 v78.6,22.45 77.6,22.45 v77.15,22 | v120.1,47.3 118.2,47.3 v117.5,48 | v86.3,54.75 v94.25,54.75 | v13.2,94.15 v10.75,96.6 | v3.55,93.25 5.64,93.25 6.75,92.14 v6.93,92.14 | v49.35,106.1 v46.65,106.1 | v50.95,106.4 v54.6,106.4 | v10.9,57.25 10.85,57.3 v9.9,57.3 | v71.6,17.55 70.4,16.35 v67.35,16.35 | v66.35,15.35 65.3,14.3 v65.3,13.85 | v16.5,54.7 16.95,55.15 27.55,55.15 v33.15,49.55 | v33.15,47.35 33.15,46.8 v42.8,37.15 | v156.75,13.6 155.21,12.06 v154.88,12.06 154.94,12.06 156.95,10.05 v157.07,10.18 | v162.75,49.55 162.9,49.7 162.9,49.97 v162.66,50.21 | v87.65,13.46 87.65,13.5 88.45,14.3 v88.45,14.51 | v46.5,35.75 47.6,36.85 v47.62,36.82 | v37.3,50.75 37.16,50.75 37.01,50.6 v35.85,50.6 | v36.9,55.6 36.9,52.95 36.93,52.92 36.93,52.7 | 36.93,52.7 36.93,52.48 36.74,52.29 v36.74,51.5 | 36.93,52.7 v36.45,52.7
  pour Top: 6.46,48.31 6.39,48.24 6.37,48.22 0.18,48.22 0.18,0.18 76.12,0.18 76.12,10.07 76.14,10.09 76.21,10.16 76.23,10.18 94.57,10.18 94.59,10.16 94.66,10.09 94.68,10.07 94.68,0.18 170.02,0.18 170.02,67.02 92.18,67.02 92.16,67.04 92.04,67.16 92.02,67.18 92.02,111.02 68.58,111.02 68.58,109.78 68.56,109.76 68.54,109.74 68.52,109.72 19.68,109.72 19.66,109.74 19.59,109.81 19.57,109.83 19.57,111.02 0.18,111.02 0.18,66.88 6.37,66.88 6.39,66.86 6.46,66.79 6.48,66.77 6.48,48.33
  pour Bottom: 6.46,48.26 6.44,48.24 6.42,48.22 0.18,48.22 0.18,0.18 76.12,0.18 76.12,10.07 76.14,10.09 76.21,10.16 76.23,10.18 94.57,10.18 94.59,10.16 94.66,10.09 94.68,10.07 94.68,0.18 170.02,0.18 170.02,67.02 92.13,67.02 92.11,67.04 92.04,67.11 92.02,67.13 92.02,111.02 68.58,111.02 68.58,109.78 68.56,109.76 68.54,109.74 68.52,109.72 19.68,109.72 19.66,109.74 19.59,109.81 19.57,109.83 19.57,111.02 0.18,111.02 0.18,66.88 6.37,66.88 6.39,66.86 6.46,66.79 6.48,66.77 6.48,48.28
GPIO8
  Top 0.15: R1.1 19.05,46.35 19.05,48.75 U2.10
I2C_PW  (via drill 0.3)
  Top 0.3: C1.1 158.25,5.03 157.28,5.03 C2.1 157.2,5.18 156.15,6.23 R2-PINH.2 156.07,6.3 155.1,6.3 R1_PINH.2 155.25,6.38 155.1,6.53 155.1,6.83 155.47,7.2 155.47,8.03 | 155.47,8.03 155.47,8.62 155.55,8.7 155.55,9.08 SENSOR2.8 155.47,9.22 155.47,9.9 | 155.47,8.03 156.82,8.03 157.12,8.32 157.12,9.08 SENSOR2.6 | 155.47,9.9 156.38,10.8 156.38,11.55 156.3,11.62 156.3,12 SENSOR2.2 | v25.2,70.73 21.6,67.12 21.6,66.3 U2.17 | v155.32,10.05 155.47,9.9
  Bottom 0.3: v25.2,70.73 29.77,70.73 30.38,71.33 86.78,71.33 119.92,38.17 127.2,38.17 v155.32,10.05
INT_RTC  (via drill 0.3)
  Top 0.15: 88.16,62.21 88.12,62.17 88.12,60.82 U5.3 | 88.16,62.21 88.88,62.92 89.25,62.92 R1_PINH1.1 89.25,62.85 89.4,62.7 v89.4,62.17 | v36.75,61.95 28.95,61.95 16.5,49.5 16.5,48.75 U2.8 | v38.85,62.85 87.53,62.85 88.16,62.21 | v119.62,57 120.53,56.1 120.67,56.1 INT_RTC.TP | v102.53,57 94.58,57 v93.75,57.82
  Bottom 0.15: v36.75,61.95 37.65,62.85 v38.85,62.85 | v102.53,57 v119.62,57 | v89.4,62.17 v93.75,57.82
IO/BOOT  (via drill 0.3)
  Top 0.15: R_BOOT.1 20.85,108.9 22.12,108.9 22.2,108.98 BOOT_BUTTON.4 22.27,109.05 25.73,109.05 BOOT_BUTTON.3 25.8,108.98 25.95,108.98 27.15,107.78 27.15,107.62 C6.1 27.15,107.55 27.29,107.32 v27.29,106.82 | v19.5,65.1 19.95,64.65 23.25,64.65 24.07,65.48 24.07,66.23 U2.15
  Bottom 0.15: v19.5,65.1 19.5,69.38 19.65,69.53 19.65,77.85 27.29,85.49 v27.29,106.82
IO/CHANGE  (via drill 0.3)
  Top 0.15: C10.1 67.12,108.83 65.92,108.83 65.78,108.98 CHANGE_BUTTON.3 65.7,109.05 62.33,109.05 CHANGE_BUTTON.4 62.25,108.98 62.17,108.9 60.9,108.9 R_CHANGE.1 60.83,108.83 60.75,108.75 60.23,108.75 v60,108.53 | v22.05,64.2 21.9,64.35 15.07,64.35 13.95,65.48 13.95,66.23 U2.23
  Bottom 0.15: v22.05,64.2 22.05,71.18 59.4,108.53 v60,108.53
MISO  (via drill 0.3)
  Top 0.15: J2.P7 5.85,93.75 5.7,93.6 4.8,93.6 4.28,93.08 4.28,78.6 8.93,73.95 8.93,66.3 U2.27 8.93,66.23 8.93,65.48 v9.75,64.65 | v36.38,59.25 36.38,59.92 U6.2 | v34.65,52.73 34.58,52.8 34.5,52.8 33.98,52.27 33.98,52.12 R8.1 | v76.95,63.3 85.12,71.48 86.85,71.48 91.5,66.83 115.65,66.83 122.47,60 152.32,60 MISO.TP | v19.27,58.57 v13.2,64.65 | v32.7,52.05 33.9,52.05 R8.1 | R8.1 33.94,50.98 32.7,49.74 32.7,47.16 32.96,46.9 34.63,46.9 41.75,39.77 41.75,37 43.52,35.23 D12.1
  Bottom 0.15: v34.65,52.73 36.38,54.45 36.38,55.77 35.85,56.3 35.85,56.62 36.38,57.15 | v76.95,63.3 70.8,57.15 36.38,57.15 | v13.2,64.65 v9.75,64.65 | v19.27,58.57 26.18,58.57 v32.7,52.05 | 36.38,57.15 37.02,57.8 37.05,57.8 37.05,58.57 v36.38,59.25
MOSI  (via drill 0.3)
  Top 0.15: v30.6,70.8 30.82,71.03 30.82,71.1 30.68,71.25 30.68,72.11 MOSI.TP 30.65,72.15 30.07,72.15 v21.68,80.55 | U2.7 15.22,48.75 15.22,52.36 29.1,66.23 v29.1,69.1 | v18,80.55 9.07,89.48 7.72,89.48 7.58,89.33 5.92,89.33 J2.P3 | v70.72,17.55 71.4,16.88 72.67,16.88 75.85,13.7 80.29,13.7 81.3,12.69 81.3,11.96 81.56,11.7 81.94,11.7 82.2,11.96 82.2,12.07 84.67,14.54 84.67,15.22 J3.14 | R7.1 44.77,28.88 45.3,28.88 v46.05,29.62 48.9,32.48 48.9,34.6 | v43.73,58.05 43.95,57.82 43.95,57.6 44.1,57.45 U6.5 44.17,57.38 44.17,39.32 48.9,34.6 | v51.75,36.52 51.75,36.17 D11.1 50.68,35.1 50.1,35.1 49.65,35.55 v49.2,35.55 48.9,35.25 48.9,34.6
  Bottom 0.15: v21.68,80.55 v18,80.55 | v70.72,17.55 v51.75,36.52 | v43.73,58.05 43.73,58.65 31.65,70.73 30.6,70.73 v30.6,70.8 29.1,69.3 v29.1,69.1
N$1
  Top 0.15: J3.24 77.62,15.3 74.55,18.38 73.2,18.38 73.05,18.22 73.05,17.92 72.83,17.7 EPD_C12.2
N$2  (via drill 0.3)
  Top 0.15: 117.64,37.91 117.97,37.57 117.97,37.05 118.05,36.98 C1_BAT1.1 | 117.64,37.91 116.7,38.85 116.1,38.85 D2.1 | 117.64,37.91 118.54,38.81 | 118.54,38.81 118.65,38.92 119.25,38.92 IC1.3 | 118.54,38.81 118.35,39 118.35,40.5 118.65,40.8 119.25,40.8 IC1.1 119.33,40.88 119.92,40.88 v120.15,41.1 | v131.62,45.67 132,46.05 132.68,46.05 Q1.2
  Bottom 0.15: v131.62,45.67 124.72,45.67 v120.15,41.1
N$3  (via drill 0.3)
  Top 0.15: v164.55,52.73 164.55,52.95 164.4,53.1 164.32,53.1 164.25,53.02 163.65,53.02 J1.A5 | R2-USB1.2 155.25,44.1 155.91,44.1 v162.06,50.25
  Bottom 0.15: v164.55,52.73 162.49,50.66 162.47,50.66 v162.06,50.25
N$4
  Top 0.15: CHG_LED.C 120.08,50.55 120.08,49.35 R1_BAT.1
N$5
  Top 0.15: C4.1 93.97,28.27 93.75,28.27 93,29.02 90.22,29.02 89.55,28.35 88.95,28.35 88.88,28.27 D4.1 88.8,28.27 88.65,28.42 87.83,28.42 83.47,32.77 83.47,33 D3.2
N$6  (via drill 0.3)
  Top 0.15: v122.25,49.35 121.35,49.35 R1_BAT.2 | v125.7,48.38 125.7,48.9 125.78,48.98 U1.1
  Bottom 0.15: v122.25,49.35 124.72,49.35 v125.7,48.38
N$8
  Top 0.15: R2_BAT.2 123.15,47.02 123.15,48.98 U1.5
N$9  (via drill 0.3)
  Top 0.15: v79.65,17.32 79.65,16.65 80.62,15.68 80.62,15.3 J3.22 | v79.65,19.12 79.42,19.35 79.42,19.72 79.35,19.8 EPD_C10.2
  Bottom 0.15: v79.65,19.12 v79.65,17.32
N$10
  Top 0.15: IC2.5 50.4,104.25 51.15,103.5 51.83,103.5 51.98,103.35 C_DELAY.1
N$11  (via drill 0.3)
  Top 0.15: v153.68,46.42 153.97,46.12 153.97,45.3 R2-USB.1 | v164.55,55.95 164.4,56.1 164.32,56.1 164.25,56.02 163.65,56.02 J1.B5
  Bottom 0.15: v153.68,46.42 153.68,46.57 153.6,46.65 153.6,47.05 162.5,55.95 v164.55,55.95
N$12  (via drill 0.3)
  Top 0.15: v82.42,19.12 82.88,19.57 82.88,19.88 EPD_C8.2 | J3.20 81.65,14.45 v81.54,14.34
  Bottom 0.15: v81.54,14.34 81.59,14.39 81.59,18.29 v82.42,19.12
N$13  (via drill 0.3)
  Top 0.15: v84.08,19.12 84.53,19.57 84.53,19.88 EPD_C7.2 | J3.19 82.12,15.22 82.12,14.39 82.15,14.37 v82.15,14.13
  Bottom 0.15: v84.08,19.12 82.28,17.32 82.28,14.62 81.89,14.62 82.15,14.37 v82.15,14.13
N$14  (via drill 0.3)
  Top 0.15: v85.8,19.2 86.03,19.42 86.03,19.72 86.17,19.88 EPD_C6.2 | v82.69,14.41 82.65,14.45 J3.18
  Bottom 0.15: v82.69,14.41 82.69,16.09 v85.8,19.2
N$21  (via drill 0.3)
  Top 0.15: v93.22,59.85 93.3,59.77 93.3,52.35 R_CAPACITOR.1 | v89.1,63.98 88.88,64.2 88.88,64.65 88.8,64.73 D7.1
  Bottom 0.15: v89.1,63.98 v93.22,59.85
N$22  (via drill 0.3)
  Top 0.15: v89.17,16.57 89.17,15.3 J3.5 | v88.5,20.55 88.5,20.47 89.03,19.95 EPD_C2.2
  Bottom 0.15: v89.17,16.57 89.17,19.88 v88.5,20.55
N$23  (via drill 0.3)
  Top 0.15: v89.62,16.12 89.62,15.9 89.7,15.83 89.62,15.75 89.62,15.3 J3.4 | v91.58,19.65 91.35,19.88 90.83,19.88 90.75,19.95 EPD_C1.2
  Bottom 0.15: v89.62,16.12 89.62,17.7 v91.58,19.65
PREVGH  (via drill 0.3)
  Top 0.15: J3.21 81.15,15.97 81.08,16.05 v80.92,16.05 | v80.92,19.12 80.92,19.72 81.08,19.88 EPD_C9.2 81.15,19.95 81.22,20.02 81.75,20.02 81.97,20.25 81.97,20.55 81.9,20.62 81.9,21.38 82.28,21.75 82.58,21.75 85.65,24.82 88.8,24.82 D5.1
  Bottom 0.15: v80.92,19.12 v80.92,16.05
PREVGL  (via drill 0.3)
  Top 0.15: 80.14,14.59 80.03,14.47 77.62,14.47 74.55,17.55 74.03,17.55 73.95,17.62 EPD_C11.2 | 80.14,14.59 80.17,14.62 80.17,15.22 J3.23 | v92.33,25.72 92.33,28.2 D4.2 | 80.14,14.59 v80.25,14.47
  Bottom 0.15: v92.33,25.72 92.33,25.05 88.05,20.77 88.05,19.5 88.72,18.82 88.72,18.38 86.85,16.5 85.65,16.5 82.85,13.7 81.02,13.7 v80.25,14.47
RESE  (via drill 0.3)
  Top 0.15: J3.3 90.15,16.27 88.28,18.15 87.97,18.15 v87.6,18.52 | v77.55,24 77.1,23.55 77.1,23.4 | 77.1,23.4 76.5,24 76.35,24 75.75,24.6 R3.2 | 77.1,23.4 Q3.2
  Bottom 0.15: v87.6,18.52 82.12,24 v77.55,24
RESE'  (via drill 0.3)
  Top 0.15: SJ1.2 67.72,10.88 68.03,11.18 68.03,12.68 R2.2 68.1,12.68 68.1,13.35 68.17,13.43 v68.17,13.8 | v73.58,23.92 73.65,24 74.7,24 75.15,23.55 75.22,23.55 75.45,23.32 R3.1 | v69,17.92 71.7,20.62 71.7,21.32 v72.43,22.05
  Bottom 0.15: v73.58,23.92 72.43,22.78 v72.43,22.05 | v68.17,13.8 68.17,14.25 66.45,15.98 66.45,16.72 66.98,17.25 68.33,17.25 v69,17.92
RESET  (via drill 0.3)
  Top 0.15: C5.1 52.05,108.9 50.85,108.9 50.77,108.98 RESET_BUTTON.3 50.7,109.05 49.05,109.05 48.41,108.41 | 48.41,108.41 47.85,108.98 47.25,108.98 RESET_BUTTON.4 47.17,108.98 47.02,108.83 45.9,108.83 R_RESET.1 | 48.41,108.41 48.45,108.38 48.45,106.8 47.62,105.98 47.62,104.55 IC2.1 47.55,104.48 v46.73,104.48 | v12.3,53.85 10.2,51.75 10.2,48.75 U2.3
  Bottom 0.15: v12.3,53.85 12.3,56.17 19.95,63.82 19.95,77.7 v46.73,104.48
RTC_RST  (via drill 0.3)
  Top 0.15: v25.2,67.43 23.25,67.43 22.88,67.05 22.88,66.3 U2.16 | v72.53,59.55 81.15,59.55 81.38,59.32 86.03,59.32 86.62,59.92 86.62,60 86.78,60.15 86.78,60.75 U5.4
  Bottom 0.15: v25.2,67.43 34.5,67.43 36.3,65.62 36.3,61.73 40.42,57.6 70.58,57.6 v72.53,59.55
RX  (via drill 0.3)
  Top 0.15: v17.02,56.32 12.68,60.67 12.68,66.23 U2.24 | RX.TP 101.47,22.35 101.1,22.72 101.1,23.32 100.95,23.47 100.95,23.92 91.05,33.82 82.65,33.82 81,32.17 79.41,32.17 69.51,22.27 v64.65,22.27
  Bottom 0.15: v64.65,22.27 47.48,22.27 16.05,53.7 16.05,54.89 17.02,55.87 v17.02,56.32
SCK  (via drill 0.3)
  Top 0.15: 25.65,68.65 25.65,70.95 25.57,71.03 25.57,71.1 25.73,71.25 25.73,72.08 25.65,72.15 SCK.TP 25.65,72.23 25.12,72.23 24.75,72.6 24.6,72.6 19.5,77.7 v18.6,77.7 | U2.6 13.95,51.51 25.65,63.21 25.65,68.65 | v4.72,91.58 5.85,91.58 J2.P5 | J3.13 85.12,15.22 85.12,14.57 82.5,11.95 82.5,11.84 81.02,10.35 69.15,10.35 68.33,9.53 65.4,9.53 51.15,23.77 51.15,28.8 51,28.95 R6.1 51.08,28.95 v51.75,28.95 | v53.7,30.9 53.77,30.97 53.77,35.4 54.35,35.98 54.35,36.7 | v37.35,61.88 37.35,62.02 29.82,69.55 26.55,69.55 25.65,68.65 | v43.05,58.65 44.1,58.65 U6.6 44.17,58.65 44.17,58.42 44.55,58.05 44.7,58.05 52.5,50.25 52.5,38.4 53.67,37.23 53.83,37.23 54.35,36.7 | D10.1 52.78,36.01 52.9,36.13 53.78,36.13 54.35,36.7
  Bottom 0.15: v18.6,77.7 v4.72,91.58 | v51.75,28.95 v53.7,30.9 | v37.35,61.88 39.83,61.88 v43.05,58.65
SCL  (via drill 0.3)
  Top 0.15: 159.26,10.01 157.95,11.33 157.95,12 SENSOR2.4 | 159.26,10.01 159.3,9.97 159.3,4.65 158.93,4.28 156.53,4.28 156.15,4.65 156.15,4.95 R2-PINH.1 | v137.47,51.67 137.03,52.12 136.72,52.12 U4.7 | v164.55,21.52 165.22,20.85 J4.4 165.3,20.77 165.38,20.7 166.12,20.7 166.72,20.1 166.72,17.1 160.18,10.55 159.8,10.55 159.26,10.01 | v18.45,64.8 17.77,65.48 17.77,66.23 U2.20 | v19.35,63.9 21.68,63.9 22.57,63 v23.7,63 | v87.3,52.8 87.83,53.32 89.33,53.32 90.6,52.05 90.6,51.45 U5.16 | v96.75,52.2 v106.65,52.2
  Bottom 0.15: v164.55,21.52 137.47,48.6 v137.47,51.67 107.17,51.67 v106.65,52.2 | v18.45,64.8 v19.35,63.9 | v87.3,52.8 86.81,52.31 | v96.75,52.2 91.5,52.2 88.28,48.98 87.53,48.98 86.85,49.65 86.85,52.27 86.81,52.31 | 86.81,52.31 85.81,51.31 37.19,51.31 36.92,51.05 36.55,51.05 36.29,51.31 35.39,51.31 v23.7,63
SDA  (via drill 0.3)
  Top 0.15: 157.09,12.86 157.12,12.83 157.12,12.08 SENSOR2.3 | 157.09,12.86 156.9,13.05 155.1,13.05 154.2,12.15 154.2,5.33 154.5,5.03 155.03,5.03 R1_PINH.1 | v142.05,48 137.32,52.73 137.1,52.73 137.03,52.65 136.72,52.65 U4.8 | v142.05,44.7 142.05,42.23 142.09,42.19 | 142.09,42.19 164.4,19.88 165.15,19.88 165.22,19.8 J4.3 165.3,19.8 165.38,19.72 166.12,19.72 166.43,19.42 166.43,17.25 166.12,16.95 161.18,16.95 157.09,12.86 | v19.05,69.15 19.05,66.3 U2.19 | v20.62,79.5 21.07,79.5 38.17,62.4 69,62.4 81.53,49.88 88.35,49.88 88.69,50.21 | 88.69,50.21 88.8,50.32 88.8,50.4 89.33,50.92 89.33,51.38 U5.15 | v126.97,37.65 128.93,37.65 133.43,42.15 142.05,42.15 142.09,42.19 | v88.8,50.17 88.72,50.17 88.69,50.21
  Bottom 0.15: v142.05,44.7 v142.05,48 | v19.05,69.15 19.05,69.38 19.35,69.68 19.35,78.23 v20.62,79.5 | v88.8,50.17 91.12,52.5 92.17,52.5 92.33,52.65 98.06,52.65 113.21,37.5 113.59,37.5 113.74,37.65 v126.97,37.65
SRC
  Top 0.15: C4.2 94.58,29.55 94.88,29.25 94.88,27.6 92.33,25.05 92.33,24.82 D5.2 92.25,24.82 90.3,24.82 89.55,25.57 84.75,25.57 | 84.75,25.57 84.75,27.07 82.94,28.89 82.28,29.55 82.26,29.57 L1.1 | 84.75,25.57 84.75,24.38 82.5,22.12 80.87,22.12 80.59,21.85 80.06,21.85 79.2,22.71 79.2,23.92 Q3.3
SS_SD  (via drill 0.3)
  Top 0.15: v9.3,90.38 12.3,93.38 12.3,97.23 D8.1 | v7.95,89.03 7.35,88.43 6.45,88.43 6.3,88.28 J2.P2 | v68.7,11.62 68.62,11.55 69.08,11.1 69.45,11.1 R10.1 | v11.78,47.62 11.55,47.85 11.55,48.6 U2.4
  Bottom 0.15: v9.3,90.38 8.5,90.38 7.95,89.83 v7.95,89.03 8.03,89.03 19.05,78 19.05,69.83 11.85,62.62 11.85,47.62 v11.78,47.62 47.77,11.62 v68.7,11.62
TX  (via drill 0.3)
  Top 0.15: U2.25 11.4,61.5 15.9,57 v15.9,56.77 | v43.73,47.62 v37.12,47.62 | v105.3,22.88 105.83,22.35 106.5,22.35 TX.TP
  Bottom 0.15: v15.9,56.77 27.3,56.77 36.45,47.62 v37.12,47.62 | v43.73,47.62 80.55,47.62 v105.3,22.88
USB_D+  (via drill 0.3)
  Top 0.15: v154.43,46.05 155.03,46.65 155.03,46.8 D1.4 | v107.4,52.12 107.25,52.12 106.72,51.6 v96.6,51.6 | v34.42,48.98 v37.27,48.98 | v24.98,48.98 24.38,48.98 24.15,48.75 U2.14
  Bottom 0.15: v154.43,46.05 153.97,46.05 153.9,45.98 144.75,45.98 138.6,52.12 v107.4,52.12 | v96.6,51.6 91.35,51.6 88.42,48.67 41.25,48.67 40.95,48.98 v37.27,48.98 | v24.98,48.98 v34.42,48.98
USB_D-  (via drill 0.3)
  Top 0.15: v108.53,52.57 105.75,49.8 v95.1,49.8 | v41.7,48.23 41.1,48.23 40.95,48.07 v34.5,48.07 | v23.25,47.62 22.8,48.07 22.8,48.75 U2.13 | D1.6 155.1,48.75 157.17,48.75 157.63,49.21 157.63,51.24 v157.35,51.52
  Bottom 0.15: v108.53,52.57 138.6,52.57 139.59,51.58 156.72,51.58 156.78,51.52 v157.35,51.52 | v95.1,49.8 90,49.8 88.42,48.23 v41.7,48.23 | v34.5,48.07 23.7,48.07 v23.25,47.62
VBAT  (via drill 0.3)
  Top 0.3: U4.2 134.78,52.12 134.78,51.67 U4.3 134.62,51.6 134.03,51.6 133.95,51.67 133.88,51.67 131.4,49.2 | 131.4,49.2 129.68,50.92 129.68,51.3 129.6,51.38 C2_BAT.1 129.53,51.45 129,51.45 128.47,50.92 125.85,50.92 U1.3 125.7,50.92 124.95,50.92 v122.85,53.02 | 131.4,49.2 131.7,48.9 131.7,48.23 Q1.3 | v25.05,73.5 19.88,78.68 9.9,78.68 8.47,77.25 7.65,77.25 VBAT.TP
  Bottom 0.3: v25.05,73.5 85.28,73.5 105.67,53.1 122.78,53.1 v122.85,53.02
VBUS  (via drill 0.3)
  Top 0.3: 151.35,47.48 150.07,47.48 C5_USB.1 149.93,47.48 132.6,47.48 131.4,46.27 131.1,46.27 130.95,46.12 Q1.1 130.8,46.05 130.8,45.52 129.3,44.02 | 151.35,47.48 151.65,47.77 152.47,47.77 D1.2 152.62,47.77 152.83,47.77 153.7,48.65 153.7,49.37 154.21,49.88 156.53,49.88 C4_USB.1 | PFMF.050.1.2 154.88,41.55 151.43,45 151.43,47.4 151.35,47.48 | 129.3,44.02 128.85,43.57 128.85,40.35 R1_PWRUSB.2 | 129.3,44.02 124.72,48.6 124.72,49.05 123.22,50.55 123.22,50.77 U1.4 123.15,50.92 122.47,50.92 122.17,50.62 121.58,50.62 CHG_LED.A 121.42,50.62 v120.83,51.23 | 116.1,49.73 116.1,50.48 C1_BAT.1 116.1,50.62 115.65,50.62 103.12,63.15 94.12,63.15 87.22,70.05 86.4,70.05 VBUS.TP | 116.1,49.73 116.1,41.02 D2.2 | v116.25,49.73 116.1,49.73
  Bottom 0.3: v120.83,51.23 117.75,51.23 v116.25,49.73
VRTC  (via drill 0.3)
  Top 0.3: C10_SUPERCAP.2 95.47,50.92 95.33,51.07 93.3,51.07 R_CAPACITOR.2 93.15,51.15 92.62,51.15 92.33,51.45 92.33,53.1 | 92.33,53.1 92.33,59.7 93.45,60.82 94.05,60.82 C8.1 | v88.88,52.88 88.12,52.12 88.12,51.45 U5.14 | v92.17,53.1 92.33,53.1
  Bottom 0.3: v88.88,52.88 91.95,52.88 v92.17,53.1
VUSB
  Top 0.15: J1.A4 163.65,51.75 163.65,52.05 J1.B9 163.05,52.05 162.97,51.98 162.82,51.98 162.3,52.5 162.3,56.1 162.9,56.7 163.65,56.7 | 163.65,56.7 163.65,56.85 J1.A9 | 163.65,56.7 163.65,56.62 | 163.65,56.62 163.65,56.55 J1.B4 163.65,56.62 | 163.65,56.62 164.55,56.62 165.68,55.5 165.68,47.85 157.2,39.38 153.15,39.38 150.97,41.55 PFMF.050.1.1